# EAGLE board ir_remote_v2 (3) (EAGLE 9.6.2)
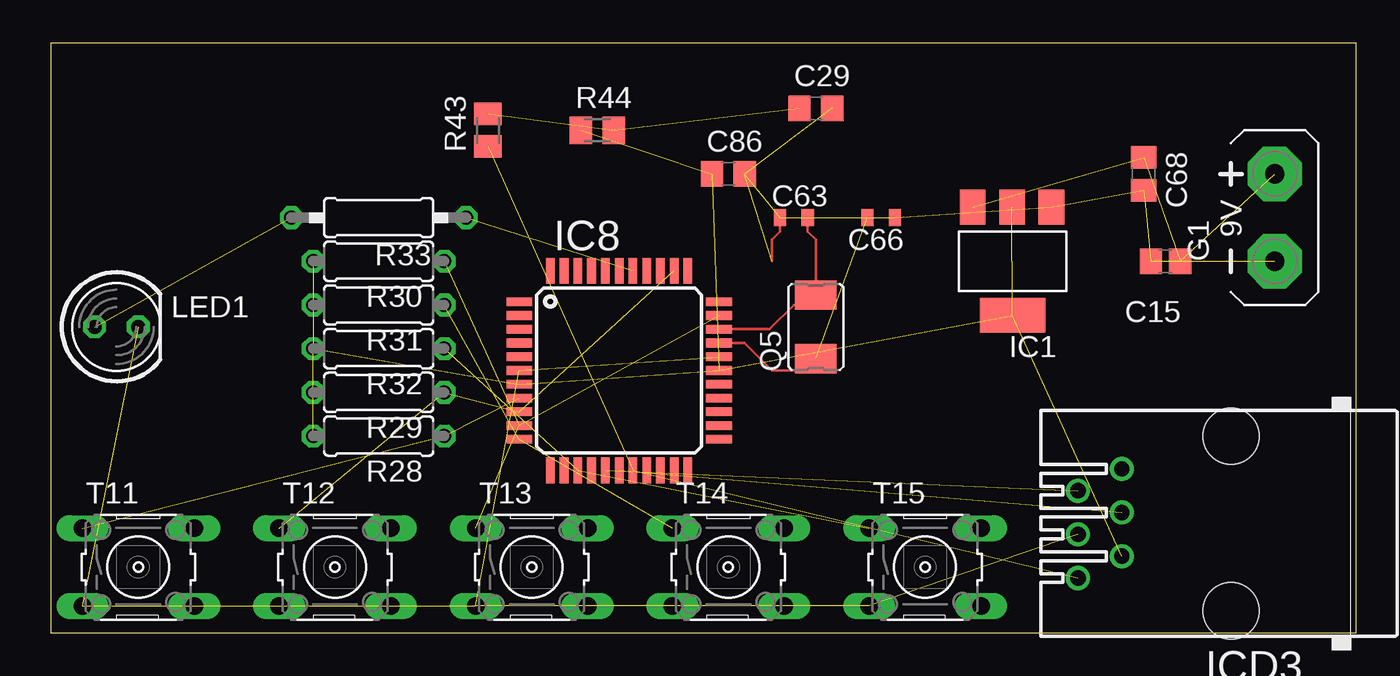
[diagram p0: board, top side]

Size 75.87 x 34.28 mm. Coordinates in mm from the lower left corner, seen from the top.
Outline: 0,0 75.87,0 75.87,34.28 0,34.28 0,0
Copper layers (1*16): Top 0.035mm / dielectric 1.5mm / Bottom 0.035mm
Design rules "default": minimum track width 6mil, minimum drill 0.35mm, track to track 6mil, track to pad 6mil, pad to pad 6mil, via to via 6mil, smd to smd 6mil, copper to edge 40mil, drill to drill 6mil, minimum pad ring 10mil, minimum via ring 8mil, stop-mask expansion 4mil, vias tented up to drill 0mil, thermal gap 10mil

## Footprints (pad centres in the part's own frame; a part is rotated, then mirrored left to right if it is on the bottom)
C0805 = smd 1.3 x 1.5: 1 -0.85,0; 2 0.85,0
C0805' = smd 1.3 x 1.5: 1 -0.95,0; 2 0.95,0
C0603_WE = smd 0.7 x 1: 1 -0.8,0; 2 0.8,0
AB9V = drill 1.118 pad 3.15 octagon: + 0,2.54; - 0,-2.54
SOT223 = smd 1.499 x 2.007: 1 -2.261,-3.15; 2 0.025,-3.15; 3 2.311,-3.15 | smd 3.81 x 2.007: 4 0,3.15
TQFP44 = smd 1.5 x 0.5: 1 -5.8,4; 2 -5.8,3.2; 3 -5.8,2.4; 4 -5.8,1.6; 5 -5.8,0.8; 6 -5.8,0; 7 -5.8,-0.8; 8 -5.8,-1.6; 9 -5.8,-2.4; 10 -5.8,-3.2; 11 -5.8,-4; 23 5.8,-4; 24 5.8,-3.2; 25 5.8,-2.4; 26 5.8,-1.6; 27 5.8,-0.8; 28 5.8,0; 29 5.8,0.8; 30 5.8,1.6; 31 5.8,2.4; 32 5.8,3.2; 33 5.8,4 | smd 0.5 x 1.5: 12 -4,-5.8; 13 -3.2,-5.8; 14 -2.4,-5.8; 15 -1.6,-5.8; 16 -0.8,-5.8; 17 0,-5.8; 18 0.8,-5.8; 19 1.6,-5.8; 20 2.4,-5.8; 21 3.2,-5.8; 22 4,-5.8; 34 4,5.8; 35 3.2,5.8; 36 2.4,5.8; 37 1.6,5.8; 38 0.8,5.8; 39 0,5.8; 40 -0.8,5.8; 41 -1.6,5.8; 42 -2.4,5.8; 43 -3.2,5.8; 44 -4,5.8
520250-3 = drill 0.889: 1 -3.175,8.89; 2 -1.905,6.35; 3 -0.635,8.89; 4 0.635,6.35; 5 1.905,8.89; 6 3.175,6.35 | hole 3.251: -5.08,0; 5.08,0
LED5MM = drill 0.813 octagon: A -1.27,0; K 1.27,0
QUARZ_HC5032/2 = smd 1.7 x 2.4: 1 -1.85,0; 2 1.85,0
0207/7 = drill 0.813 octagon: 1 -3.81,0; 2 3.81,0
0207/10 = drill 0.813 octagon: 1 -5.08,0; 2 5.08,0
M0805 = smd 1.3 x 1.6: 1 -0.95,0; 2 0.95,0
TASTER3301 = drill 1.016 long: 1 -3.251,2.261; 2 3.251,2.261; 3 -3.251,-2.261; 4 3.251,-2.261

## Placement (x,y rotation side)
C15  100n  [C0805]  64.77,21.59 180 top
C29  100n  [C0805']  44.45,30.48 0 top
C63  22p  [C0603_WE]  43.18,24.13 0 top
C66  22p  [C0603_WE]  48.26,24.13 180 top
C68  10u  [C0805']  63.5,26.67 270 top
C86  10u  [C0805']  39.37,26.67 0 top
G1  AB9V  [AB9V]  71.12,24.13 0 top
IC1  AP1117E50G  [SOT223]  55.88,21.59 180 top
IC8  [TQFP44]  33.02,15.24 0 top
ICD3  [520250-3]  68.58,6.35 90 top
LED1  [LED5MM]  3.81,17.78 0 top
Q5  10MHz  [QUARZ_HC5032/2]  44.45,17.78 90 top
R28  10k  [0207/7]  19.05,11.43 180 top
R29  10k  [0207/7]  19.05,13.97 180 top
R30  10k  [0207/7]  19.05,21.59 180 top
R31  10k  [0207/7]  19.05,19.05 180 top
R32  10k  [0207/7]  19.05,16.51 180 top
R33  1k  [0207/10]  19.05,24.13 180 top
R43  470  [M0805]  25.4,29.21 90 top
R44  10k  [M0805]  31.75,29.21 0 top
T11  TASTER3301  [TASTER3301]  5.08,3.81 0 top
T12  TASTER3301  [TASTER3301]  16.51,3.81 0 top
T13  TASTER3301  [TASTER3301]  27.94,3.81 0 top
T14  TASTER3301  [TASTER3301]  39.37,3.81 0 top
T15  TASTER3301  [TASTER3301]  50.8,3.81 0 top

## Library data of the parts
C15 = rcl_416
C29 C63 C66 C68 C86 R28-R32 R43 R44 = rcl
G1 = battery
IC1 = Bernd_110428
IC8 Q5 T11-T15 = Bernd
ICD3 = con-amp
LED1 = led
R33 = resistor

## Nets
+9V: C15.1 C68.1 G1.+ IC1.3
D0_LCD: IC8.27
D1_LCD: IC8.26
GND: C15.2 C29.2 C63.1 C66.1 C68.2 C86.2 G1.- IC1.1 IC8.6 IC8.29 ICD3.3 LED1.K T11.3 T12.3 T13.3 T14.3 T15.3
MCLR: IC8.18 ICD3.1 R43.1
N$19: LED1.A R33.2
N$24: C29.1 R43.2 R44.2
N$47: C66.2 IC8.30 Q5.1
N$48: C63.2 IC8.31 Q5.2
RB0: IC8.8 R28.1 T11.1
RB1: IC8.9 IC8.35 R29.1 T12.1
RB2: IC8.10 IC8.32 R30.1 T13.1
RB3: IC8.11 R31.1 T14.1
RB4: IC8.14 R32.1 T15.1
RB5: IC8.15
RB6: IC8.16 ICD3.5
RB7: IC8.17 ICD3.4
RD0_LED: IC8.38 R33.1
RDS_INT: IC8.36
VCC: C86.1 IC1.2 IC1.4 IC8.7 IC8.28 ICD3.2 R28.2 R29.2 R30.2 R31.2 R32.2 R44.1

## Tracks (layer width: path | path; a pad name or v marks a point on that pad's centre or on a via)
+9V  (3 unrouted)
GND  (16 unrouted)
  Top 0.152: C63.1 42.38,23.33 41.91,22.86 41.91,21.59
MCLR  (2 unrouted)
N$19  (1 unrouted)
N$24  (2 unrouted)
N$47  (1 unrouted)
  Top 0.152: Q5.1 43.76,15.24 41.91,15.24 40.31,16.84 IC8.30
N$48
  Top 0.152: IC8.31 41.77,17.64 43.18,19.05 43.87,19.05 Q5.2 44.45,22.86 43.98,23.33 C63.2
RB0  (2 unrouted)
RB1  (3 unrouted)
RB2  (3 unrouted)
RB3  (2 unrouted)
RB4  (2 unrouted)
RB6  (1 unrouted)
RB7  (1 unrouted)
RD0_LED  (1 unrouted)
VCC  (11 unrouted)